# Altium PCB control_board_v2.PcbDoc (part 1 of 2)
Units mil, origin at the board's own origin, x right, y up, seen from the top; angles counter-clockwise.
Board outline 4214.76 x 4940 mil, 2 copper layers (Top Layer, Bottom Layer); 54 components, 71 nets, 299 pads, 38 vias.
Unrouted connection lines stored in the file: 3.
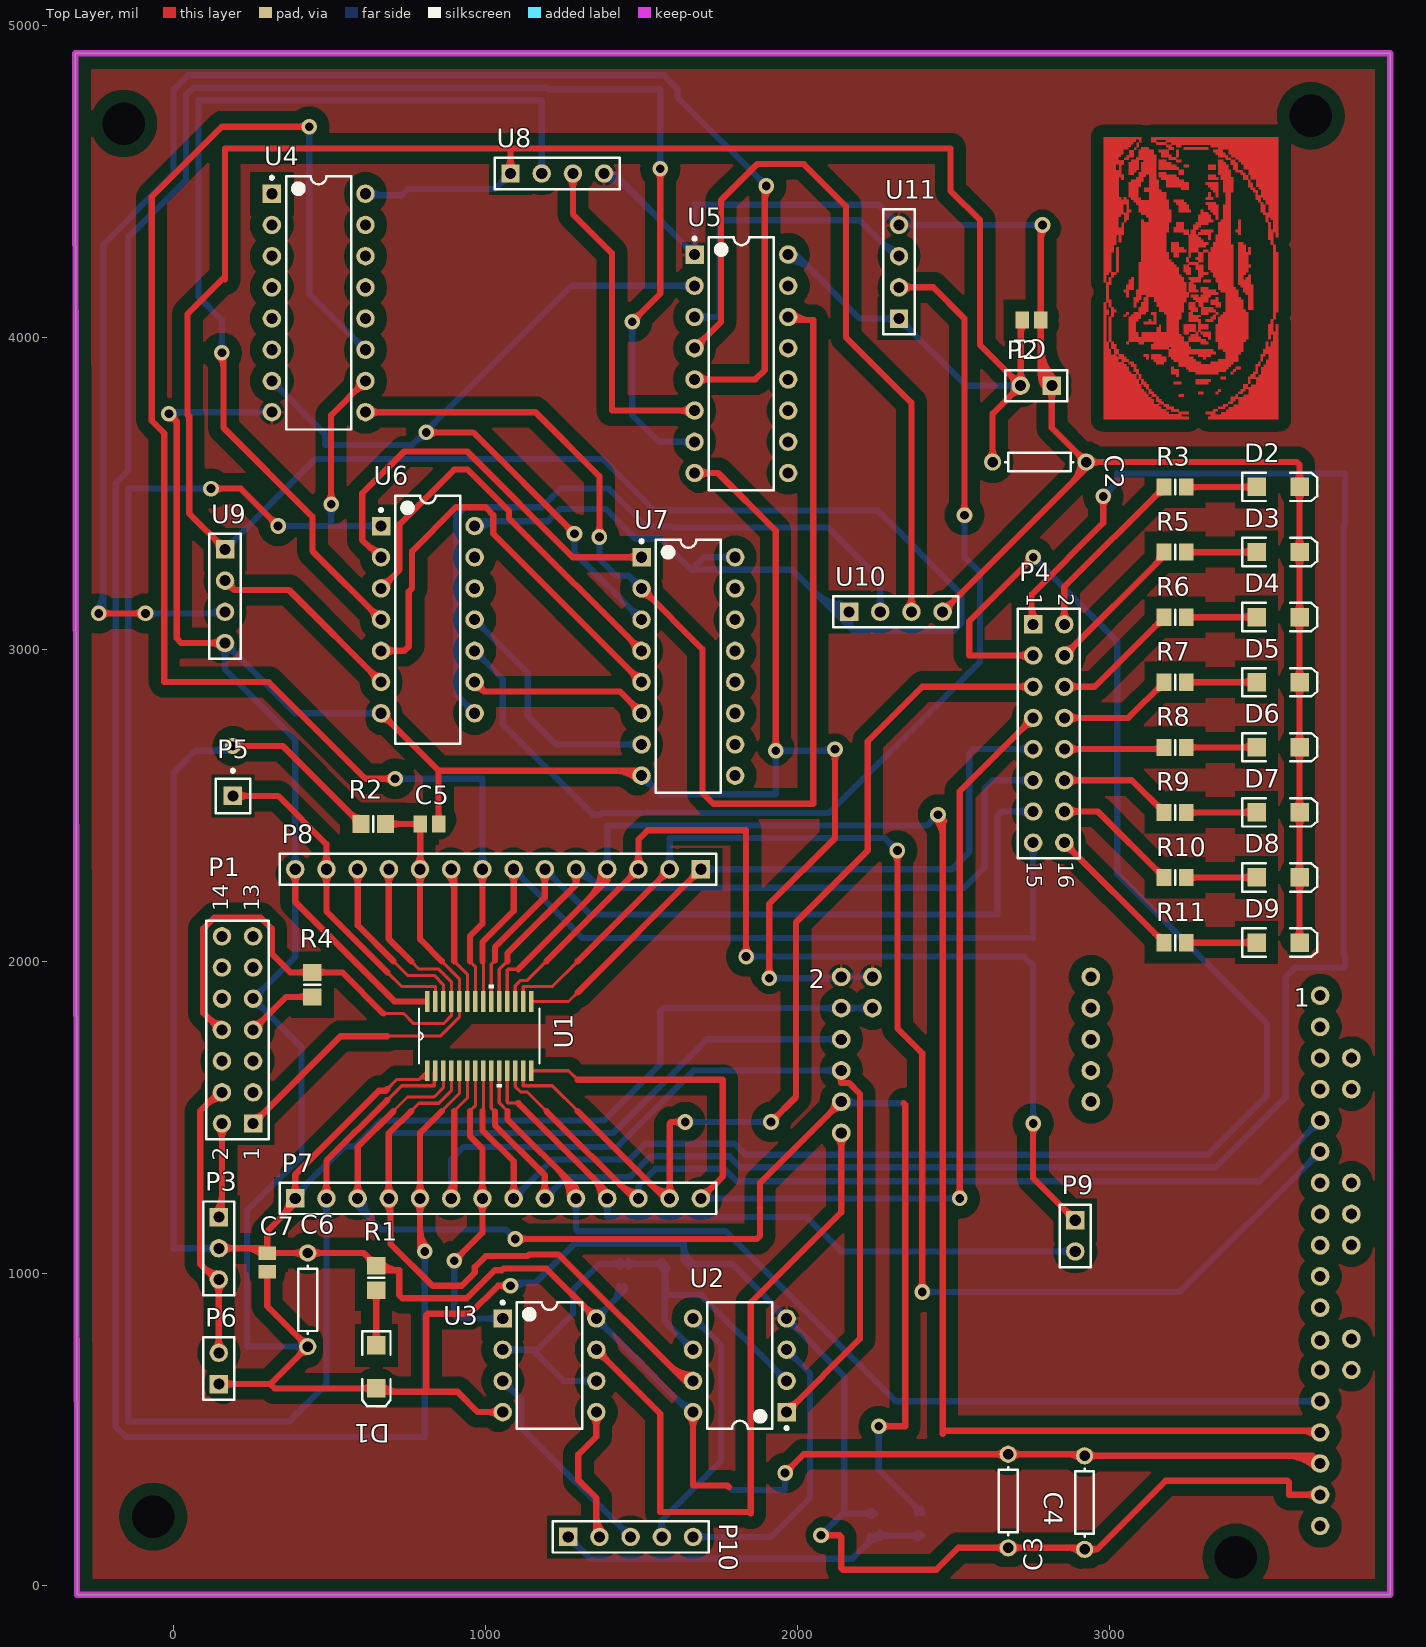
[diagram p0: Top Layer view]
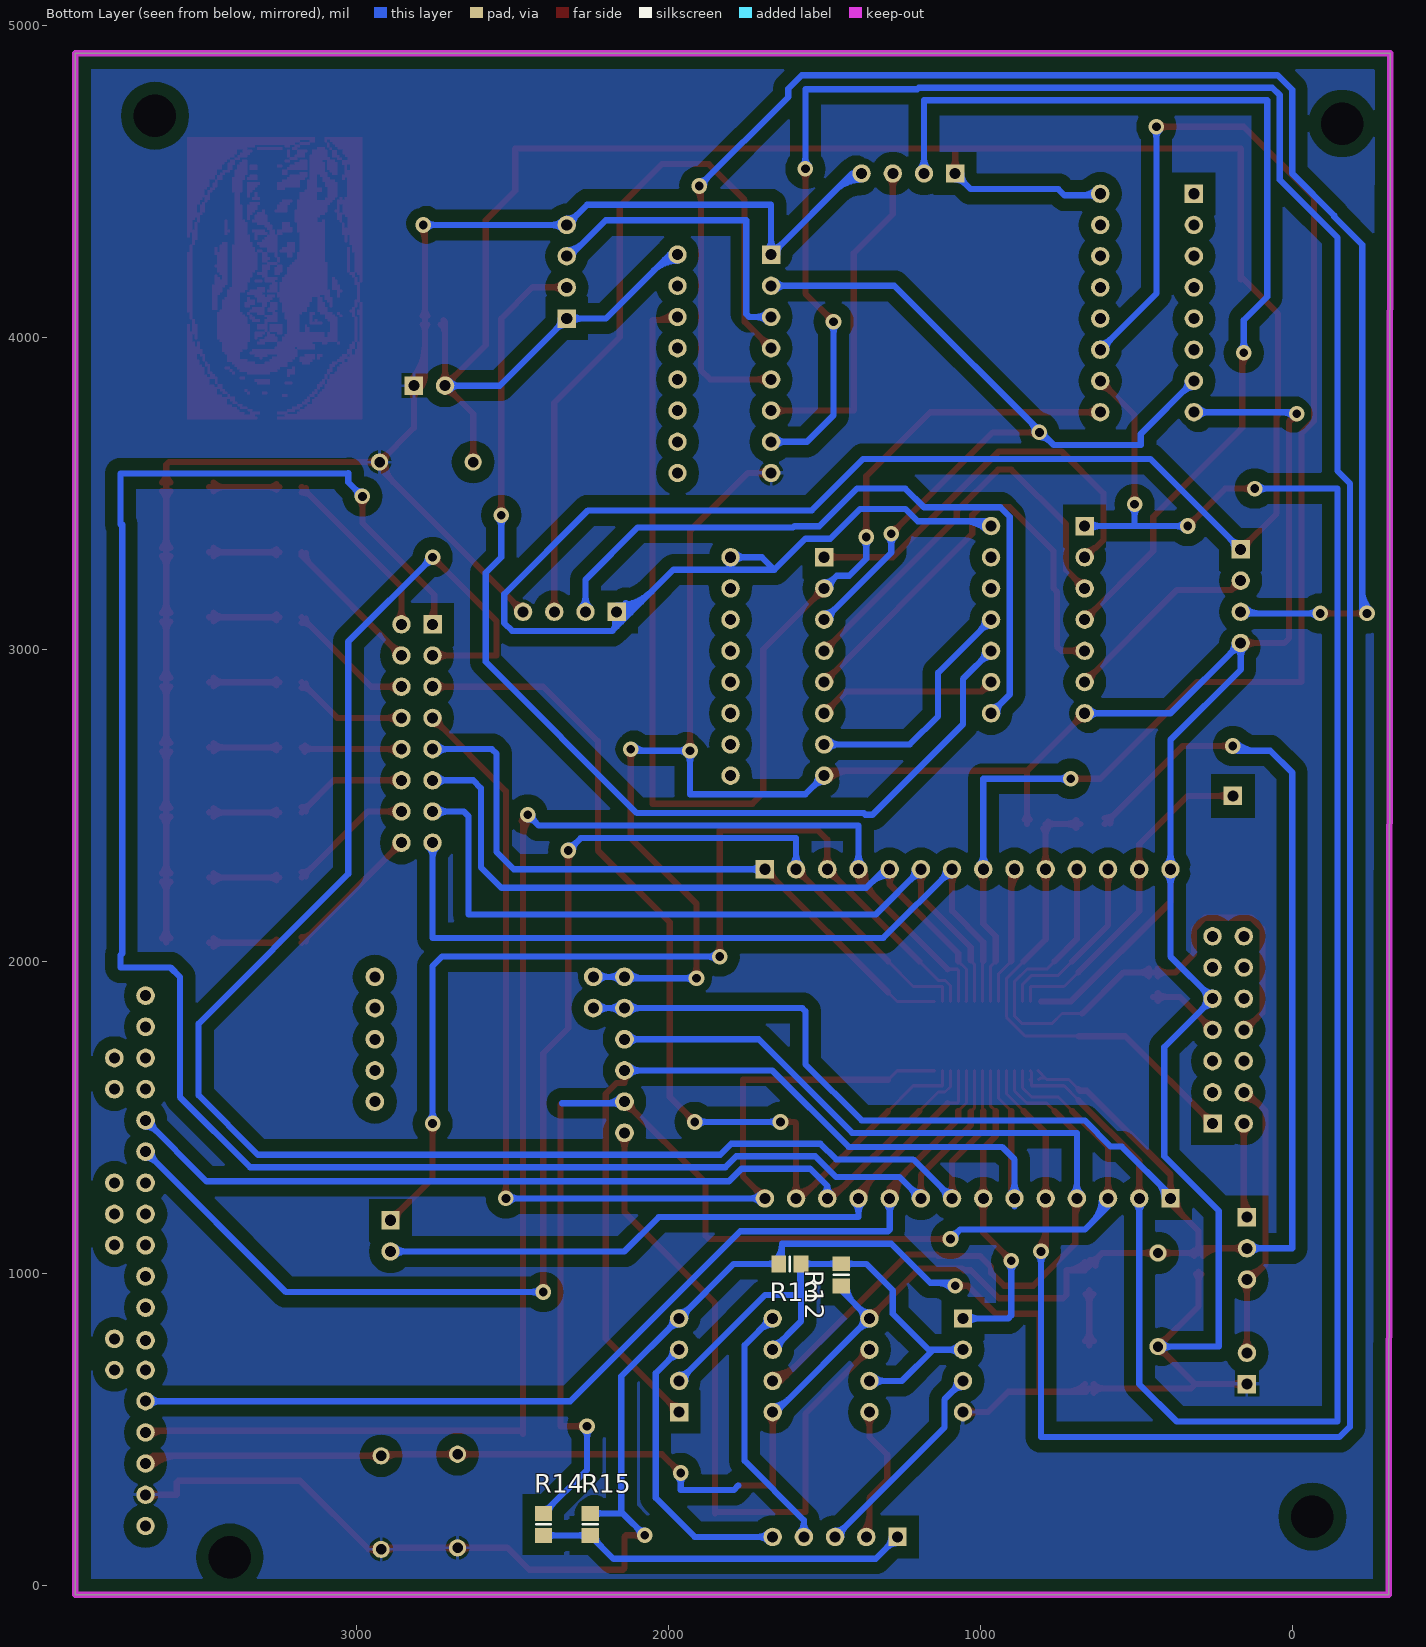
[diagram p1: Bottom Layer view, seen from below]

## Layer stack, top to bottom
Top Layer: signal copper 1.4
Dielectric: dielectric 12.6, FR-4, Dk 4.8
Bottom Layer: signal copper 1.4

## Board outline
-309.32,-30 -314.76,4910 3900,4910 3900,-30

## Design rules (kind name [scope] priority, off if disabled: settings)
Clearance poly_clearance [InPolyGon] p1: gap=40
Clearance MSP_CLEARANCE [TouchesRoom('MSP_ROOM') And OnLayer('Top Layer')] p2: gap=10
Clearance "Small stuff" [(HasFootprint('6-0805_M') OR HasFootprint('6-0805_N') OR HasFootprint('PW28') OR HasFootprint('C0805'))] p3: gap=10
Clearance Clearance_1 [All] p4: gap=20
PolygonConnect [All] p1: connectstyle=Relief reliefconductorwidth=10 reliefentries=4 polygonreliefangle="90 Angle" airgapwidth=10
RoomDefinition MSP_ROOM [InComponentClass('MSP_ROOM')] p1: confinementstyle=ConfineIn formatcopy=TRUE lockcomponents=FALSE outline 685,1525 685,2000 1295,2000 1295,1525
RoutingVias [All] p1: holewidth=28 width=50 viastyle="Through Hole" minholewidth=28 minwidth=50 maxholewidth=28 maxwidth=50
SMDNeckDown [HasFootprint('PW28')] p1: percent=75.000
SolderMaskExpansion [All] p1: expansion=4
Width MSP_WIDTH [TouchesRoom('MSP_ROOM')] p1: maxlimit=20 minlimit=7 preferedwidth=20 toplayer_prefwidth=10 bottomlayer_minwidth=20 minimp=50.000000 maximp=50.000000 favimp=50.000000
Width [All] p2: maxlimit=20 minlimit=20 preferedwidth=20 minimp=50.000000 maximp=50.000000 favimp=50.000000
28 further rules are at their usual default settings.

## Classes and differential pairs
component class investigator_control_board: 1 2 C6

## Components (designator, comment, footprint, x,y, rotation, side; value= is the part's Value field where it differs from the comment)
1 "MotorDriver" MotorControlHeader 3675,190 r180 top
2 "IMU" IMU 2140,1950 r0 top
C1 "Cap" C0805 2750,4055 r180 top
C2 "Cap Pol3" AXIAL-0.3 2775,3600 r0 top
C3 "Cap Pol3" AXIAL-0.3 2675,270 r270 top
C4 "Cap Pol3" AXIAL-0.3 2920,265 r270 top
C5 "Cap" C0805 820,2440 r180 top
C6 "Cap Pol3" AXIAL-0.3 430,915 r270 top
C7 "Cap" C0805 300,1035 r90 top
D1 "LED2" 3.2X1.6X1.1 650,700 r270 top
D2 "LED2" 3.2X1.6X1.1 3540,3520.52 r0 top
D3 "LED2" 3.2X1.6X1.1 3540,3311.87 r0 top
D4 "LED2" 3.2X1.6X1.1 3540,3103.23 r0 top
D5 "LED2" 3.2X1.6X1.1 3540,2894.58 r0 top
D6 "LED2" 3.2X1.6X1.1 3540,2685.94 r0 top
D7 "LED2" 3.2X1.6X1.1 3540,2477.29 r0 top
D8 "LED2" 3.2X1.6X1.1 3540,2268.65 r0 top
D9 "LED2" 3.2X1.6X1.1 3540,2060 r0 top
P1 "Header 7X2" HDR2X7 255,1480 r90 top
P2 "Header 2" HDR1X2 2815,3845 r180 top
P3 "Power Select" HDR1X3 145,1180 r270 top
P4 "Header 8X2" HDR2X8 2755,3080 r270 top
P5 "Plug" PIN1 190,2530 r0 top
P6 "Header 2" HDR1X2 145,645 r90 top
P7 "Header 14" HDR1X14 390,1240 r0 top
P8 "Header 14" HDR1X14 1690,2295 r180 top
P9 "Header 2" HDR1X2 2890,1170 r270 top
P10 "Header 5" HDR1X5 1265,155 r0 top
R1 "Res3" 6-0805_M 650,985 r90 top
R2 "Res3" 6-0805_M 640,2440 r180 top
R3 "Res3" 6-0805_N 3210,3520 r0 top
R4 "Res3" 6-0805_M 445,1925 r90 top
R5 "Res3" 6-0805_N 3210,3311.35 r0 top
R6 "Res3" 6-0805_N 3210,3102.71 r0 top
R7 "Res3" 6-0805_N 3210,2894.06 r0 top
R8 "Res3" 6-0805_N 3210,2685.42 r0 top
R9 "Res3" 6-0805_N 3210,2476.77 r0 top
R10 "Res3" 6-0805_N 3210,2268.13 r0 top
R11 "Res3" 6-0805_N 3210,2059.48 r0 top
R12 "Res3" 6-0805_N 1445,995 r270 bottom
R13 "Res3" 6-0805_N 1610,1030 r180 bottom
R14 "Res3" 6-0805_N 2400,195 r90 bottom
R15 "Res3" 6-0805_N 2250,195 r270 bottom
U1 "MSP430G2553_PW_2" PW28 980,1760 r90 top
U2 "LT1632CN8" DIP-8 1815,705 r180 top
U3 "LT1632CN8" DIP-8 1205,705 r0 top
U4 "CD4040" DIP-16 465,4110 r0 top
U5 "74153 MUX" DIP-16 1820,3915 r0 top
U6 "7404_Inverter" DIP-14 815,3095 r0 top
U7 "74139Decoder" DIP-16 1650,2945 r0 top
U8 "UltrasonicSensor" HDR1X4 1080,4525 r0 top
U9 "UltrasonicSensor" HDR1X4 165,3320 r270 top
U10 "UltrasonicSensor" HDR1X4 2165,3120 r0 top
U11 "UltrasonicSensor" HDR1X4 2325,4060 r90 top

## Footprints (in the part's own frame and the unit in brackets; to place one, negate y for a bottom-side part, rotate by r counter-clockwise, add the part's x,y. Pads: shape width x height; smd on the part's side, far side on the other; paste and mask are expansions set on the pad)
3.2X1.6X1.1 [mm] "SMT LED; 2 Flat Leads"
  rect 1.5x1.5 smd: 1(-1.75,0) 2(1.75,0)
  silkscreen extent -2.9,-1.15 3.2,1.15
6-0805_M [mm] "Chip Resistor, Body 2.0x1.2mm, IPC Low Density"
  rect 1.4x1.5 smd: 1(-1,0) 2(1,0)
  silkscreen extent 0,-0.65 0,0.65, body extent -1.07,-0.7 1.07,0.7, height 0.7
6-0805_N [mm] "Chip Resistor, Body 2.0x1.2mm, IPC Medium Density"
  rect 1.2x1.4 smd: 1(-0.9,0) 2(0.9,0)
  silkscreen extent 0,-0.6 0,0.6, body extent -1.07,-0.7 1.07,0.7, height 0.7
AXIAL-0.3 [mm] "Axial Device, Thru-Hole; 2 Leads; 0.3 in Pin Spacing"
  round 1.4 hole 0.85: 1(-3.81,0) 2(3.81,0)
  silkscreen extent -2.77,-0.76 2.77,0.76
C0805 [mm] "Chip Capacitor, Body 2.0x1.3mm, IPC High Density"
  rect 1.1x1.4 smd: 1(-0.75,0) 2(0.75,0)
  body extent -1.1,-0.72 1.1,0.72, height 1.4
DIP-8 [mm] "DIP; 8 Leads; Row Spacing 7.62 mm; Pitch 2.54 mm"
  rect 1.5x1.5 hole 0.9: 1(-3.81,3.81)
  round 1.5 hole 0.9: 2(-3.81,1.27) 3(-3.81,-1.27) 4(-3.81,-3.81) 5(3.81,-3.81) 6(3.81,-1.27) 7(3.81,1.27) 8(3.81,3.81)
  silkscreen extent -3.94,-5.15 2.65,5.23, body extent -3.6,-5.15 3.6,5.15, height 5.08
DIP-14 [mm] "DIP; 14 Leads; Row Spacing 7.62 mm; Pitch 2.54 mm"
  rect 1.5x1.5 hole 0.9: 1(-3.81,7.62)
  round 1.5 hole 0.9: 2(-3.81,5.08) 3(-3.81,2.54) 4(-3.81,0) 5(-3.81,-2.54) 6(-3.81,-5.08) 7(-3.81,-7.62) 8(3.81,-7.62) 9(3.81,-5.08) 10(3.81,-2.54) 11(3.81,0) 12(3.81,2.54) 13(3.81,5.08) 14(3.81,7.62)
  silkscreen extent -3.93,-10.1 2.65,10.1, body extent -3.6,-10.1 3.6,10.1, height 5.08
DIP-16 [mm] "DIP; 16 Leads; Row Spacing 7.62 mm; Pitch 2.54 mm"
  rect 1.5x1.5 hole 0.9: 1(-3.81,8.89)
  round 1.5 hole 0.9: 2(-3.81,6.35) 3(-3.81,3.81) 4(-3.81,1.27) 5(-3.81,-1.27) 6(-3.81,-3.81) 7(-3.81,-6.35) 8(-3.81,-8.89) 9(3.81,-8.89) 10(3.81,-6.35) 11(3.81,-3.81) 12(3.81,-1.27) 13(3.81,1.27) 14(3.81,3.81) 15(3.81,6.35) 16(3.81,8.89)
  silkscreen extent -3.93,-10.3 2.65,10.31, body extent -3.6,-10.28 3.6,10.28, height 5.08
HDR1X2 [mm] "Connector; Header; 2 Position"
  rect 1.5x1.5 hole 0.9: 1(0,0)
  round 1.5 hole 0.9: 2(2.54,0)
  silkscreen extent -1.27,-1.27 3.81,1.27
HDR1X3 [mm] "Connector; Header; 3 Position"
  rect 1.5x1.5 hole 0.9: 1(0,0)
  round 1.5 hole 0.9: 2(2.54,0) 3(5.08,0)
  silkscreen extent -1.27,-1.27 6.35,1.27
HDR1X4 [mm] "Connector; Header; 4 Position"
  rect 1.5x1.5 hole 0.9: 1(0,0)
  round 1.5 hole 0.9: 2(2.54,0) 3(5.08,0) 4(7.62,0)
  silkscreen extent -1.27,-1.27 8.89,1.27
HDR1X5 [mm] "Connector; Header; 5 Position"
  rect 1.5x1.5 hole 0.9: 1(0,0)
  round 1.5 hole 0.9: 2(2.54,0) 3(5.08,0) 4(7.62,0) 5(10.16,0)
  silkscreen extent -1.27,-1.27 11.43,1.27
HDR1X14 [mm] "Connector; Header; 14 Position"
  rect 1.5x1.5 hole 0.9: 1(0,0)
  round 1.5 hole 0.9: 2(2.54,0) 3(5.08,0) 4(7.62,0) 5(10.16,0) 6(12.7,0) 7(15.24,0) 8(17.78,0) 9(20.32,0) 10(22.86,0) 11(25.4,0) 12(27.94,0) 13(30.48,0) 14(33.02,0)
  silkscreen extent -1.27,-1.27 34.29,1.27
HDR2X7 [mm] "Connector; Header; 7x2 Position"
  rect 1.5x1.5 hole 0.9: 1(0,0)
  round 1.5 hole 0.9: 2(0,2.54) 3(2.54,0) 4(2.54,2.54) 5(5.08,0) 6(5.08,2.54) 7(7.62,0) 8(7.62,2.54) 9(10.16,0) 10(10.16,2.54) 11(12.7,0) 12(12.7,2.54) 13(15.24,0) 14(15.24,2.54)
  silkscreen extent -1.27,-1.27 16.51,3.81
HDR2X8 [mm] "Connector; Header; 8x2 Position"
  rect 1.5x1.5 hole 0.9: 1(0,0)
  round 1.5 hole 0.9: 2(0,2.54) 3(2.54,0) 4(2.54,2.54) 5(5.08,0) 6(5.08,2.54) 7(7.62,0) 8(7.62,2.54) 9(10.16,0) 10(10.16,2.54) 11(12.7,0) 12(12.7,2.54) 13(15.24,0) 14(15.24,2.54) 15(17.78,0) 16(17.78,2.54)
  silkscreen extent -1.27,-1.27 19.05,3.81
IMU [mil]
  round 60 hole 35.4: 0(0,0) 1(0,-100) 2(0,-200) 3(0,-300) 4(0,-400) 5(0,-500) 6(100,0) 7(100,-100) 8(800,0) 9(800,-100) 10(800,-200) 11(800,-300) 12(800,-400)
MotorControlHeader [mil]
  round 59.05 hole 35.43: 0(0,0) 1(0,-100) 2(0,-200)
  round 59 hole 35.43: 3(0,-300)
  round 59 hole 35.4: 4(0,-400) 18(-100,-500)
  round 60 hole 35.4: 5(0,-500) 6(0,-595) 7(0,-700) 8(0,-800) 9(0,-900) 10(0,-1000) 11(0,-1100) 12(0,-1200) 13(0,-1300) 14(0,-1400) 15(0,-1500) 16(0,-1600) 17(0,-1700) 19(-100,-600) 20(-100,-900) 21(-100,-1000) 22(-100,-1100) 23(-100,-1400) 24(-100,-1500)
PIN1 [mm] "Connector; Plug"
  rect 1.5x1.5 hole 0.9: 1(0,0)
  silkscreen extent -1.4,-1.4 1.4,2.17
PW28 [mil]
  rect 66x14 smd: 1(-111,166.34) 2(-111,140.75) 3(-111,115.16) 4(-111,89.57) 5(-111,63.98) 6(-111,38.39) 7(-111,12.8) 8(-111,-12.8) 9(-111,-38.39) 10(-111,-63.98) 11(-111,-89.57) 12(-111,-115.16) 13(-111,-140.75) 14(-111,-166.34) 15(111,-166.34) 16(111,-140.75) 17(111,-115.16) 18(111,-89.57) 19(111,-63.98) 20(111,-38.39) 21(111,-12.8) 22(111,12.8) 23(111,38.39) 24(111,63.98) 25(111,89.57) 26(111,115.16) 27(111,140.75) 28(111,166.34)
  silkscreen extent -164,-193 164,193

## Part data
C1 C5 C7: "Capacitor"
C2 C3 C4 C6: "Polarized Capacitor (Surface Mount)"
D1 D2 D3 D4 D5 D6 D7 D8 D9: "Typical RED, GREEN, YELLOW, AMBER GaAs LED"
P1: "Header, 7-Pin, Dual row"
P2 P6 P9: "Header, 2-Pin"
P3: library part "Header 3", "Header, 3-Pin"
P4: "Header, 8-Pin, Dual row"
P7 P8: "Header, 14-Pin"
P10: "Header, 5-Pin"
R1 R2 R3 R4 R5 R6 R7 R8 R9 R10 R11 R12 R13 R14 R15: "Resistor"
U1: "Imported"
U2 U3: "45MHz, 45V/µs, Dual Rail-to-Rail Input and Output Precision Operational Amplifier"

## Free pads (board coordinates)
  round 0 hole 136: 0(-160,4685) 0(-65,220) 0(3405,90) 0(3645,4710)

## Via types
v1: diameter 50, hole 28, Top Layer to Bottom Layer, 38 vias

## Nets (pads, with @x,y where several pads share a name; then routed paths per layer and width w, separated by ;. In a path a pad name is that pad's centre, name@x,y a point inside that pad or via, vN(x,y) a via of type N, cw(c..) or ccw(c..) an arc to the next point about the centre after c; other vN are vias at no path point)
1.8BIAS: R12.1 R13.2 U2.2 U2.6 U3.2 U3.6 | length 2389.8
  Bottom Layer w20: U3.2@1055,755 1150.43,755 ; U3.2@1068.81,741.19 cw(c1102.14,707.86) 1102.14,755 cw(c1102.14,802.14) U3.2@1068.81,768.81 ; U3.6@1341.19,641.19 ccw(c1307.86,607.86) 1307.86,655 ccw(c1307.86,702.14) U3.6@1341.19,668.81 ; U3.6@1355,655 1250.43,655 1150.43,755 ; 1407.13,1030 ccw(c1407.13,1064.36) R12.1@1431.43,1040.06 ; 1409.22,1030 cw(c1409.22,998.59) R12.1@1431.43,1020.8 ; R12.1@1458.57,1020.8 cw(c1480.78,998.59) 1480.78,1030 ; R12.1@1458.57,1040.06 ccw(c1482.87,1064.36) 1482.87,1030 ; R13.2@1564.93,1016.43 cw(c1541.68,993.18) 1574.57,993.18 cw(c1607.45,993.18) R13.2@1584.2,1016.43 ; R13.2@1564.93,1020.37 ccw(c1541.68,997.11) 1541.68,1030 ccw(c1541.68,1062.89) R13.2@1564.93,1039.63 ; R13.2@1565.43,1015.96 cw(c1542.91,991.08) 1576.43,992.75 ; 1576.38,993.7 cw(c1608.56,995.31) R13.2@1584.67,1016.92 ; U2.6@1645.47,755 ccw(c1598.33,755) 1631.66,788.34 ccw(c1665,821.67) U2.6@1665,774.53 ; U2.6@1665,755 1574.57,845.43 R13.2@1574.57,1030 ; U2.2@1945.47,655 ccw(c1898.33,655) 1931.66,688.34 ccw(c1965,721.67) U2.2@1965,674.53 ; U2.2@1965,655 1690,930 1579.57,930 R13.2@1574.57,1030 ; 1150.43,755 1165,755 1280,870 1280,945 1365,1030 1445,1030 R13.2@1574.57,1030
1.8IMU_CS: P10.2 U3.5 | length 589.7
  Top Layer w20: U3.5@1341.19,541.19 cw(c1307.86,507.86) 1355,507.86 cw(c1402.14,507.86) U3.5@1368.81,541.19 ; 1355,226.29 ccw(c1436.29,226.29) P10.2@1378.81,168.81 ; U3.5@1355,555 1355,476.4 1297.44,418.84 1297.44,337.44 1355,279.88 1355,165 P10.2@1365,155
1.8MISO: P10.1 R14.1 R15.2 | length 1423.9
  Bottom Layer w20: P10.1@1265,135.47 cw(c1265,88.33) 1298.34,121.66 cw(c1331.67,155) P10.1@1284.53,155 ; P10.1@1265,155 1335,85 2175.43,85 R15.2@2250,159.57 R14.1@2400,159.57 ; 2220.02,129.59 ccw(c2190.05,159.57) R15.2@2232.44,159.57 ; R15.2@2229.53,139.1 cw(c2246.06,122.56) R15.2@2246.06,145.94 ; R15.2@2263.57,149.93 cw(c2286.82,126.68) 2286.82,159.57 cw(c2286.82,192.45) R15.2@2263.57,169.2 ; R14.1@2386.43,149.94 ccw(c2363.18,126.68) 2363.18,159.57 ccw(c2363.18,192.45) R14.1@2386.43,169.2
1.8MOSI: P10.4 U2.5 | length 966.5
  Bottom Layer w20: P10.4@1551.19,168.81 ccw(c1517.86,202.14) 1565,202.14 ccw(c1612.14,202.14) P10.4@1578.81,168.81 ; P10.4@1565,155 1565,208.6 1755,398.6 1755,769.12 1669.12,855 U2.5@1665,855 ; U2.5@1665,835.47 cw(c1665,778.38) 1705.37,818.75 ; U2.5@1684.53,855 ccw(c1721.72,855) 1695.42,828.7
1.8MSP_CS: P10.3 U3.3 | length 817.9
  Bottom Layer w20: U3.3@1055,635.47 cw(c1055,588.33) 1088.34,621.66 cw(c1121.67,655) U3.3@1074.53,655 ; U3.3@1055,655 1114.53,595.47 1114.53,505.47 P10.3@1465,155 ; P10.3@1445.47,155 ccw(c1398.33,155) 1431.66,188.34 ccw(c1465,221.67) P10.3@1465,174.53
1.8SCK: P10.5 U2.3 | length 1080.9
  Bottom Layer w20: P10.5@1665,155 1915,155 2040,280 2040,680 U2.3@1965,755 ; P10.5@1678.81,141.19 cw(c1712.14,107.86) 1712.14,155 cw(c1712.14,202.14) P10.5@1678.81,168.81 ; U2.3@1965,735.47 cw(c1965,688.33) 1998.34,721.66 cw(c2031.67,755) U2.3@1984.53,755
3.3IMU_CS: 2.5 U3.7 | length 2387
  Top Layer w20: U3.7@1355,735.47 cw(c1355,688.33) 1388.34,721.66 cw(c1421.67,755) U3.7@1374.53,755 ; U3.7@1355,755 1560,550 1560,235 1845,235 1850,230 1850,905 2140,1195 2.5@2140,1450 ; 2.5@2125.86,1435.86 cw(c2091.72,1401.72) 2140,1401.72 cw(c2188.28,1401.72) 2.5@2154.14,1435.86
3.3MISO: 2.4 P7.3 R14.2 U1.3 | length 4760.6
  Top Layer w10: 704.87,1520 749.87,1565 835,1565 864.84,1594.84 U1.3@864.84,1649
  Top Layer w20: P7.3@576.19,1253.81 ccw(c542.86,1287.14) 590,1287.14 ccw(c637.14,1287.14) P7.3@603.81,1253.81 ; P7.3@590,1225 P7.3@590,1240 590,1405.13 704.87,1520 ; v1(1095,1110) 1870,1110 1880,1120 1880,1290 2.4@2140,1550 ; v1@1105.61,1099.39 cw(c1131.21,1073.79) 1131.21,1110 cw(c1131.21,1146.21) v1@1105.61,1120.61 ; 2.4@2120,1550 cw(c2071.72,1550) 2105.86,1515.86 cw(c2140,1481.72) 2.4@2140,1530 ; v1(2260,510) 2345,510 2345,1540 2340,1545 ; v1@2270.61,499.39 cw(c2296.21,473.79) 2296.21,510 cw(c2296.21,546.21) v1@2270.61,520.61
  Bottom Layer w20: P7.3@589.53,1240 ccw(c648.74,1240) 606.87,1198.13 ; P7.3@590,1215 665,1140 1065,1140 v1(1095,1110) ; P7.3@609.53,1240 ccw(c717.03,1240) 641.01,1163.99 ; v1@1080,1110 ccw(c1043.79,1110) 1069.39,1135.61 ccw(c1095,1161.21) v1@1095,1125 ; 2.4@2140,1550 2145,1545 2340,1545 ; 2.4@2154.14,1535.86 cw(c2176.21,1513.79) 2176.21,1545 ; 2.4@2154.14,1564.14 ccw(c2200.36,1610.36) 2200.36,1545 ; v1@2249.39,499.39 cw(c2223.79,473.79) 2260,473.79 cw(c2296.21,473.79) v1@2270.61,499.39 ; v1(2260,510) 2260,370.43 R14.2@2400,230.43 ; 2370.02,260.41 cw(c2340.05,230.43) R14.2@2382.44,230.43 ; R14.2@2379.53,250.9 ccw(c2396.06,267.44) R14.2@2396.06,244.06
3.3MOSI: 2.2 P7.4 U1.4 U2.7 | length 4138.5
  Top Layer w10: 761.43,1520 786.43,1545 850,1545 890.43,1585.43 U1.4@890.43,1649
  Top Layer w20: P7.4@676.19,1226.19 cw(c630.79,1180.79) 695,1180.79 ; P7.4@676.19,1253.81 ccw(c642.86,1287.14) 690,1287.14 ccw(c737.14,1287.14) P7.4@703.81,1253.81 ; 695,1204.93 cw(c725.07,1204.93) P7.4@703.81,1226.19 ; 761.43,1520 690,1448.57 P7.4@690,1240 690,1225 695,1220 695,1095 830,960 923.43,960 965,1001.57 965,1020 1000,1055 1134.39,1055 1139.39,1060 1234.18,1060 1639.18,655 U2.7@1665,655 ; 1587.59,706.59 ccw(c1665,784) U2.7@1665,674.53 ; 1621.74,672.45 ccw(c1665,715.71) U2.7@1665,654.53
  Bottom Layer w20: P7.4@676.19,1253.81 ccw(c642.86,1287.14) 690,1287.14 ccw(c737.14,1287.14) P7.4@703.81,1253.81 ; P7.4@690,1240 690,1450 1410,1450 1710,1750 2.2@2140,1750 ; 2.2@2125.86,1735.86 ccw(c2091.72,1701.72) 2091.72,1750 ccw(c2091.72,1798.28) 2.2@2125.86,1764.14
3.3MSP_CS: P7.7 U1.7 U3.1 | length 1499.1
  Top Layer w10: 950,1520 967.2,1537.2 U1.7@967.2,1649
  Top Layer w20: v1(900,1040) 990,1130 ; v1@900,1055 ccw(c900,1091.21) 925.61,1065.61 ccw(c951.21,1040) v1@915,1040 ; 950,1520 950,1440 990,1400 P7.7@990,1240 990,1225 990,1130 ; P7.7@976.19,1253.81 ccw(c942.86,1287.14) 990,1287.14 ccw(c1037.14,1287.14) P7.7@1003.81,1253.81 ; P7.7@990,1215 990,1130 ; 990,1192.86 ccw(c942.86,1192.86) 976.19,1226.19 cw(c942.86,1192.86) 990,1192.86 ; 990,1192.86 cw(c1037.14,1192.86) 1003.81,1226.19 ccw(c1037.14,1192.86) 990,1192.86
  Bottom Layer w20: v1@889.39,1029.39 cw(c863.79,1003.79) 900,1003.79 cw(c936.21,1003.79) v1@910.61,1029.39 ; v1(900,1040) 900,865 910,855 U3.1@1055,855 ; U3.1@1041.19,841.19 ccw(c1007.86,807.86) 1007.86,855 ccw(c1007.86,902.14) U3.1@1041.19,868.81
3.3SCK: 2.3 P7.6 U1.6 U2.1 | length 3594.2
  Top Layer w10: 900,1520 941.61,1561.61 U1.6@941.61,1649
  Top Layer w20: P7.6@876.19,1253.81 ccw(c818.71,1311.29) 900,1311.29 ; P7.6@890,1225 900,1235 900,1520 ; U2.1@1965,555 2200,790 2200,1574.85 2164.85,1610 2140,1610 ; U2.1@1965,574.53 ccw(c1965,621.67) 1998.34,588.34 ccw(c2031.67,555) U2.1@1984.53,555 ; 2.3@2140,1650 2140,1610 ; 2140,1610 ccw(c2110,1610) 2128,1634 cw(c2110,1610) 2140,1610 ; 2140,1610 cw(c2170,1610) 2152,1634 ccw(c2170,1610) 2140,1610
  Bottom Layer w20: P7.6@876.19,1253.81 ccw(c842.86,1287.14) 890,1287.14 ccw(c937.14,1287.14) P7.6@903.81,1253.81 ; P7.6@890,1215 P7.6@890,1240 890,1365 930,1405 1421.57,1405 1666.57,1650 2.3@2140,1650 ; 2.3@2125.86,1635.86 ccw(c2091.72,1601.72) 2091.72,1650 ccw(c2091.72,1698.28) 2.3@2125.86,1664.14
+5V: C1.2 C2.1 P2.2 U4.16 U5.16 U6.14 U7.16 U8.1 U9.1 U10.1 U11.1 | length 13024.4
  Top Layer w20: U9.1@145.47,3320 ccw(c98.33,3320) 131.66,3353.34 ccw(c165,3386.67) U9.1@165,3339.53 ; U9.1@165,3320 50,3435 50,3746.57 45,3751.57 45,4075 165,4195 ; 165,4185 165,4195 ; U8.1@1066.19,4538.81 ccw(c1032.86,4572.14) 1080,4572.14 ccw(c1127.14,4572.14) U8.1@1093.81,4538.81 ; U8.1@1080,4525 1080,4600 ; C2.1@2612.58,3612.42 ccw(c2582.61,3642.39) 2625,3642.39 ccw(c2667.39,3642.39) C2.1@2637.42,3612.42 ; C2.1@2625,3600 2625,3755 P2.2@2715,3845 ; P2.2@2701.19,3858.81 ccw(c2667.86,3892.14) 2715,3892.14 ccw(c2762.14,3892.14) P2.2@2728.81,3858.81 ; P2.2@2715,3825.47 ccw(c2715,3778.33) 2681.66,3811.66 ccw(c2648.33,3845) 2695.47,3845 ccw(c2648.33,3845) 2681.66,3878.34 ccw(c2715,3911.67) P2.2@2715,3864.53 ; 2715,4007.75 cw(c2761.82,4007.75) C1.2@2728.71,4040.85 ; C1.2@2720.47,4055 2715,4049.53 P2.2@2715,3845 ; 165,4195 165,4605 2490,4605 2490,4470 2585,4375 2585,3975 P2.2@2715,3845
  Bottom Layer w20: U9.1@165,3320 455,3610 1375,3610 1540,3445 2257,3445 2525,3177 2525,3084 2500,3059 2179,3059 ; U9.1@165,3339.53 ccw(c165,3386.67) 198.34,3353.34 ccw(c231.67,3320) U9.1@184.53,3320 ; U4.16@615,4455 730,4455 750,4475 1030,4475 U8.1@1080,4525 ; U4.16@628.81,4446.19 cw(c650.07,4424.93) 650.07,4455 ; U4.16@628.81,4473.81 ccw(c674.21,4519.21) 674.21,4455 ; U6.14@964.67,3395.33 cw(c1000.07,3359.93) 1000.07,3410 ; U6.14@965,3395 980,3410 1199.79,3410 ; U6.14@978.81,3381.19 cw(c1048.36,3311.64) 1048.36,3410 ; U8.1@1060.47,4525 cw(c1013.33,4525) 1046.66,4491.66 cw(c1080,4458.33) U8.1@1080,4505.47 ; 1199.79,3410.21 1239.58,3450 1385,3450 1480.47,3354.53 1560,3354.53 1659.53,3255 ; U7.16@1786.19,3281.19 ccw(c1752.86,3247.86) 1752.86,3295 ccw(c1752.86,3342.14) U7.16@1786.19,3308.81 ; U7.16@1787.99,3279.6 cw(c1768.8,3255) 1800,3255 ; U7.16@1795,3295 1699.53,3295 1659.53,3255 ; U7.16@1800,3295 1800,3255 ; U7.16@1812.01,3279.6 ccw(c1831.2,3255) 1800,3255 ; U5.16@1970,4245.47 cw(c1970,4137.97) 2046.01,4213.99 ; U5.16@1970,4265 1995,4265 2200,4060 U11.1@2325,4060 2540,3845 P2.2@2715,3845 ; U5.16@1970,4265.47 cw(c1970,4206.26) 2011.87,4248.13 ; 2051.43,3186.57 ccw(c2165,3300.14) U10.1@2165,3139.53 ; 2085.57,3152.43 ccw(c2165,3231.85) U10.1@2165,3119.53 ; 2119.71,3118.29 ccw(c2165,3163.57) U10.1@2165,3099.53 ; U10.1@2136.24,3148.47 ccw(c2159.83,3125.12) U10.1@2136.36,3101.64 ; U10.1@2150.45,3134.4 ccw(c2174.12,3110.98) 2150.57,3087.43 ; U10.1@2164.66,3120.33 ccw(c2188.4,3096.83) 2164.78,3073.22 ; U10.1@2178.88,3106.26 ccw(c2202.69,3082.69) 2179,3059 ; U11.1@2311.19,4046.19 ccw(c2277.86,4012.86) 2277.86,4060 ccw(c2277.86,4107.14) U11.1@2311.19,4073.81 ; U11.1@2325,4040.47 cw(c2325,3993.33) 2358.34,4026.66 cw(c2391.67,4060) U11.1@2344.53,4060 ; P2.2@2701.19,3831.19 ccw(c2667.86,3797.86) 2667.86,3845 ccw(c2667.86,3892.14) P2.2@2701.19,3858.81 ; 1659.53,3255 1800,3255 ; 1800,3255 1983,3255 2179,3059
E0: U5.6 U8.3 | length 1224.9
  Top Layer w20: U8.3@1266.19,4511.19 cw(c1232.86,4477.86) 1280,4477.86 cw(c1327.14,4477.86) U8.3@1293.81,4511.19 ; U8.3@1280,4525 1280,4395 1405,4270 1405,3765 U5.6@1670,3765 ; U5.6@1656.19,3751.19 ccw(c1622.86,3717.86) 1622.86,3765 ccw(c1622.86,3812.14) U5.6@1656.19,3778.81
E1: U5.5 U9.3 | length 5571
  Top Layer w20: v1(-240,3115) v1@-110,3115 ; v1@-229.39,3104.39 cw(c-203.79,3078.79) -203.79,3115 cw(c-203.79,3151.21) v1@-229.39,3125.61 ; v1@-100.61,3104.39 ccw(c-126.21,3078.79) -126.21,3115 ccw(c-126.21,3151.21) v1@-100.61,3125.61 ; U5.5@1670,3865 1865,3865 1895,3895 v1@1895,4465 ; U5.5@1683.81,3851.19 cw(c1717.14,3817.86) 1717.14,3865 cw(c1717.14,3912.14) U5.5@1683.81,3878.81 ; 1895,4436.72 cw(c1948.28,4436.72) v1@1910.61,4474.39
  Bottom Layer w20: v1@-250.61,3125.61 ccw(c-312.43,3187.43) -225,3187.43 ; v1(-240,3115) -225,3130 -225,4296.57 -135,4386.57 -135,4390 0,4525 0,4793.14 46.86,4840 1571.57,4840 1615,4796.57 1615,4770 v1(1900,4485) ; v1@-236.46,3111.46 ccw(c-264.14,3139.14) -225,3139.14 ; v1(-90,3115) 160,3115 U9.3@165,3120 ; v1@-79.39,3104.39 cw(c-53.79,3078.79) -53.79,3115 cw(c-53.79,3151.21) v1@-79.39,3125.61 ; 105.79,3115 ccw(c105.79,3179.21) U9.3@151.19,3133.81 ; 129.93,3115 cw(c129.93,3084.93) U9.3@151.19,3106.19 ; v1@1885,4485 ccw(c1848.79,4485) 1874.39,4510.61 ccw(c1900,4536.21) v1@1900,4500
E2: U5.4 U10.3 | length 2548.9
  Top Layer w20: U5.4@1670,3965 1755,4050 1755,4440 1870,4555 2020,4555 2155,4420 2155,4000 2365,3790 U10.3@2365,3120 ; U5.4@1670,3984.53 ccw(c1670,4031.67) 1703.34,3998.34 ccw(c1736.67,3965) U5.4@1689.53,3965 ; U10.3@2351.19,3133.81 ccw(c2317.86,3167.14) 2365,3167.14 ccw(c2412.14,3167.14) U10.3@2378.81,3133.81
E3: U5.3 U11.3 | length 1154.9
  Bottom Layer w20: U5.3@1670,4065 1740,4065 1750,4075 1750,4375 2200,4375 2315,4260 U11.3@2325,4260 ; U5.3@1683.81,4051.19 cw(c1717.14,4017.86) 1717.14,4065 cw(c1717.14,4112.14) U5.3@1683.81,4078.81 ; 2274.59,4300.41 ccw(c2325,4350.81) U11.3@2325,4279.53 ; 2298.74,4276.26 cw(c2282.47,4260) U11.3@2305.47,4260
ECHO: P7.5 U1.5 U5.7 | length 10052.8
  Top Layer w10: 860,1520 916.02,1576.02 U1.5@916.02,1649
  Top Layer w20: P7.5@776.19,1226.19 cw(c742.86,1192.86) 790,1192.86 cw(c837.14,1192.86) P7.5@803.81,1226.19 ; P7.5@776.19,1253.81 ccw(c742.86,1287.14) 790,1287.14 ccw(c837.14,1287.14) P7.5@803.81,1253.81 ; 790,1094.14 ccw(c829.14,1094.14) v1@801.46,1066.46 ; 790,1142.43 ccw(c877.43,1142.43) v1@815.61,1080.61 ; v1(805,1070) 790,1085 P7.5@790,1240 790,1450 860,1520 ; v1(1470,4050) 1560,4140 v1(1560,4540) ; v1@1470,4065 ccw(c1470,4101.21) 1495.61,4075.61 ccw(c1521.21,4050) v1@1485,4050 ; v1@1549.39,4529.39 cw(c1523.79,4503.79) 1560,4503.79 cw(c1596.21,4503.79) v1@1570.61,4529.39
  Bottom Layer w20: v1@794.39,1059.39 cw(c768.79,1033.79) 805,1033.79 cw(c841.21,1033.79) v1@815.61,1059.39 ; v1(805,1070) 805,475 -151.57,475 -185,508.43 -185,3531.57 -145,3571.57 -145,4320 40,4505 40,4776.57 63.43,4800 1196.57,4800 1201.57,4795 1560,4795 v1(1560,4540) ; v1@1459.39,4039.39 cw(c1433.79,4013.79) 1470,4013.79 cw(c1506.21,4013.79) v1@1480.61,4039.39 ; v1(1470,4050) 1470,3750 1555,3665 U5.7@1670,3665 ; v1@1549.39,4550.61 ccw(c1523.79,4576.21) 1560,4576.21 ccw(c1596.21,4576.21) v1@1570.61,4550.61 ; U5.7@1656.19,3651.19 ccw(c1622.86,3617.86) 1622.86,3665 ccw(c1622.86,3712.14) U5.7@1656.19,3678.81
ENCODER_1: P7.11 P9.2 U1.11 | length 2426
  Top Layer w10: U1.11@1069.57,1649 1069.57,1548.72 1072.85,1545.43 1104.57,1545.43
  Top Layer w20: 1104.57,1545.43 1390,1260 P7.11@1390,1240 P7.11@1390,1225 ; 1342.52,1307.48 cw(c1275.04,1240) P7.11@1370.47,1240 ; 1376.66,1273.34 cw(c1343.33,1240) P7.11@1390.47,1240
  Bottom Layer w20: P7.11@1376.19,1226.19 cw(c1342.86,1192.86) 1390,1192.86 cw(c1437.14,1192.86) P7.11@1403.81,1226.19 ; P7.11@1390,1225 1390,1180 2030,1180 2140,1070 P9.2@2890,1070 ; P9.2@2876.19,1056.19 ccw(c2842.86,1022.86) 2842.86,1070 ccw(c2842.86,1117.14) P9.2@2876.19,1083.81
ENCODER_2: P8.3 P9.1 U1.17 | length 3700.6
  Top Layer w10: U1.17@1095.16,1871 1095.16,1921.69 1112.46,1939 1134,1939 1195,2000
  Top Layer w20: 1195,2000 P8.3@1490,2295 1490,2390 1520,2420 1835,2420 v1@1835,2025 ; P8.3@1470.47,2295 cw(c1423.33,2295) 1456.66,2261.66 cw(c1490,2228.33) P8.3@1490,2275.47 ; P8.3@1476.19,2308.81 ccw(c1442.86,2342.14) 1490,2342.14 ccw(c1537.14,2342.14) P8.3@1503.81,2308.81 ; v1@1824.39,2025.61 ccw(c1798.79,2051.21) 1835,2051.21 ccw(c1871.21,2051.21) v1@1845.61,2025.61 ; v1@2744.39,1469.39 cw(c2718.79,1443.79) 2755,1443.79 cw(c2791.21,1443.79) v1@2765.61,1469.39 ; v1(2755,1480) 2755,1305 P9.1@2890,1170 ; P9.1@2870.47,1170 ccw(c2823.33,1170) 2856.66,1203.34 ccw(c2890,1236.67) P9.1@2890,1189.53
  Bottom Layer w20: v1(1835,2015) 2725,2015 2755,1985 v1(2755,1480) ; v1@1845.61,2004.39 cw(c1871.21,1978.79) 1871.21,2015 cw(c1871.21,2051.21) v1@1845.61,2025.61 ; v1@2744.39,1490.61 ccw(c2718.79,1516.21) 2755,1516.21 ccw(c2791.21,1516.21) v1@2765.61,1490.61
GND: 1.1 2.0 2.6 C1.1 C2.2 C3.2 C4.2 C5.1 C6.2 C7.1 D1.2 D2.2 D3.2 D4.2 D5.2 D6.2 D7.2 D8.2 D9.2 P1.9 P2.1 P6.1 P8.14 R13.1 R15.1 U1.28 U2.4 U3.4 U4.8 U5.1 U5.8 U6.7 U7.8 U8.4 U9.4 U10.4 U11.4 | length 26257.9
  Top Layer w20: v1(-15,3755) 10,3730 ; v1@-14.74,3740 cw(c-14.16,3705.85) 10,3730 ; v1@0,3754.74 ccw(c34.15,3754.16) 10,3730 ; P6.1@145,645 310,645 ; U9.4@151.19,3006.19 ccw(c117.86,2972.86) 117.86,3020 ccw(c117.86,3067.14) U9.4@151.19,3033.81 ; P6.1@158.81,631.19 cw(c192.14,597.86) 192.14,645 cw(c192.14,692.14) P6.1@158.81,658.81 ; U9.4@165,3020 25,3020 10,3035 10,3730 ; C7.1@291.76,997.23 cw(c271.87,977.34) 300,977.34 cw(c328.13,977.34) C7.1@308.24,997.23 ; C7.1@300,1005.47 300,895 C6.2@430,765 310,645 ; P8.14@376.19,2281.19 cw(c342.86,2247.86) 390,2247.86 cw(c437.14,2247.86) P8.14@403.81,2281.19 ; P8.14@390,2295 390,2190 709,1871 805,1871 ; C6.2@430,747.44 ccw(c430,705.05) 400.02,735.02 ccw(c370.05,765) 412.44,765 ccw(c370.05,765) 400.02,794.98 ccw(c430,824.95) C6.2@430,782.56 ; D1.2@636.19,617.29 ccw(c602.86,583.96) 602.86,631.1 ccw(c602.86,678.25) D1.2@636.19,644.91 ; D1.2@663.81,644.91 ccw(c723.95,705.05) 723.95,620 ; U6.7@665,2775.47 cw(c665,2728.33) 698.34,2761.66 cw(c731.67,2795) U6.7@684.53,2795 ; U6.7@665,2795 849.53,2610.47 ; C5.1@841.29,2454.15 ccw(c821.39,2474.04) 849.53,2474.04 ccw(c877.66,2474.04) C5.1@857.77,2454.15 ; C5.1@849.53,2440 849.53,2610.47 ; U3.4@1041.19,541.19 ccw(c1007.86,507.86) 1007.86,555 ccw(c1007.86,602.14) U3.4@1041.19,568.81 ; U3.4@1055,555 975,555 910,620 810,620 ; v1@1069.39,949.39 ccw(c1043.79,923.79) 1043.79,960 ccw(c1043.79,996.21) v1@1069.39,970.61 ; v1(1080,960) 1040,960 950,870 815,870 810,865 810,620 ; 1415.5,2610.47 cw(c1415.5,2510.5) U7.8@1486.19,2581.19 ; 1463.79,2610.47 cw(c1463.79,2558.79) U7.8@1500.33,2595.33 ; U7.8@1500,2595 1484.53,2610.47 849.53,2610.47 ; U5.8@1670,3565 1745,3565 1930,3380 v1(1930,2675) ; U5.8@1683.81,3551.19 cw(c1717.14,3517.86) 1717.14,3565 cw(c1717.14,3612.14) U5.8@1683.81,3578.81 ; v1@1898.61,1956.39 ccw(c1873,1982) 1909.22,1982 ccw(c1945.43,1982) v1@1919.82,1956.39 ; v1@1910,1945 v1(1909.22,1945.78) 1909.22,2184.22 2120,2395 v1(2120,2680) ; v1@1919.39,2685.61 ccw(c1893.79,2711.21) 1930,2711.21 ccw(c1966.21,2711.21) v1@1940.61,2685.61 ; v1(2075,160) 2135,160 2140,155 2140,55 2145,50 2445,50 2515,120 C3.2@2675,120 2915,120 C4.2@2920,115 2960,115 ; v1@2085.61,149.39 cw(c2111.21,123.79) 2111.21,160 cw(c2111.21,196.21) v1@2085.61,170.61 ; v1@2109.39,2669.39 cw(c2083.79,2643.79) 2120,2643.79 cw(c2156.21,2643.79) v1@2130.61,2669.39 ; U10.4@2465,3120 2925,3580 C2.2@2925,3600 ; U10.4@2465,3139.53 ccw(c2465,3186.67) 2498.34,3153.34 ccw(c2531.67,3120) U10.4@2484.53,3120 ; C3.2@2662.58,107.58 ccw(c2632.61,77.61) 2632.61,120 ccw(c2632.61,162.39) C3.2@2662.58,132.42 ; C3.2@2687.42,107.58 cw(c2717.39,77.61) 2717.39,120 cw(c2717.39,162.39) C3.2@2687.42,132.42 ; C1.1@2771.29,4040.85 cw(c2751.39,4020.96) 2779.53,4020.96 cw(c2807.66,4020.96) C1.1@2787.77,4040.85 ; C1.1@2771.29,4069.15 ccw(c2751.39,4089.04) 2779.53,4089.04 ccw(c2807.66,4089.04) C1.1@2787.77,4069.15 ; 2779.53,3881.21 ccw(c2851.21,3881.21) P2.1@2800.52,3830.52 ; 2779.53,3929.5 ccw(c2899.5,3929.5) P2.1@2814.67,3844.67 ; 2779.53,3977.78 ccw(c2947.78,3977.78) P2.1@2828.81,3858.81 ; 2779.53,4310.58 cw(c2834.42,4310.58) v1@2795.61,4349.39 ; v1(2785,4360) 2779.53,4354.53 C1.1@2779.53,4055 2779.53,3880.47 P2.1@2815,3845 2815,3710 C2.2@2925,3600 ; P2.1@2795.47,3845 ccw(c2748.33,3845) 2781.66,3878.34 ccw(c2815,3911.67) P2.1@2815,3864.53 ; P2.1@2801.19,3831.19 cw(c2767.86,3797.86) 2815,3797.86 cw(c2862.14,3797.86) P2.1@2828.81,3831.19 ; 2865.54,120 cw(c2865.54,60.54) C4.2@2907.58,102.58 ; 2880.88,3535.88 ccw(c2816.77,3600) 2907.44,3600 ccw(c2865.05,3600) 2895.02,3629.98 ccw(c2925,3659.95) C2.2@2925,3617.56 ; 2889.68,120 ccw(c2889.68,145.32) C4.2@2907.58,127.42 ; 2915.02,3570.02 ccw(c2885.05,3600) C2.2@2927.44,3600 ; C4.2@2932.93,103.12 cw(c2960,78.22) 2960,115 ; C4.2@2932.93,126.88 ccw(c2960,151.78) 2960,115 ; C2.2@2937.42,3587.58 cw(c2967.39,3557.61) 2967.39,3600 cw(c2967.39,3642.39) C2.2@2937.42,3612.42 ; D9.2@3595.09,2073.81 ccw(c3561.75,2107.14) 3608.9,2107.14 ccw(c3656.04,2107.14) D9.2@3622.71,2073.81 ; D8.2@3595.09,2254.84 cw(c3561.75,2221.5) 3608.9,2221.5 cw(c3656.04,2221.5) D8.2@3622.71,2254.84 ; D8.2@3595.09,2282.45 ccw(c3561.75,2315.79) 3608.9,2315.79 ccw(c3656.04,2315.79) D8.2@3622.71,2282.45 ; D7.2@3595.09,2463.48 cw(c3561.75,2430.15) 3608.9,2430.15 cw(c3656.04,2430.15) D7.2@3622.71,2463.48 ; D7.2@3595.09,2491.1 ccw(c3561.75,2524.44) 3608.9,2524.44 ccw(c3656.04,2524.44) D7.2@3622.71,2491.1 ; D6.2@3595.09,2672.13 cw(c3561.75,2638.79) 3608.9,2638.79 cw(c3656.04,2638.79) D6.2@3622.71,2672.13 ; D6.2@3595.09,2699.74 ccw(c3561.75,2733.08) 3608.9,2733.08 ccw(c3656.04,2733.08) D6.2@3622.71,2699.74 ; D5.2@3595.09,2880.77 cw(c3561.75,2847.44) 3608.9,2847.44 cw(c3656.04,2847.44) D5.2@3622.71,2880.77 ; D5.2@3595.09,2908.39 ccw(c3561.75,2941.73) 3608.9,2941.73 ccw(c3656.04,2941.73) D5.2@3622.71,2908.39 ; D4.2@3595.09,3089.42 cw(c3561.75,3056.08) 3608.9,3056.08 cw(c3656.04,3056.08) D4.2@3622.71,3089.42 ; D4.2@3595.09,3117.04 ccw(c3561.75,3150.37) 3608.9,3150.37 ccw(c3656.04,3150.37) D4.2@3622.71,3117.04 ; D3.2@3595.09,3298.07 cw(c3561.75,3264.73) 3608.9,3264.73 cw(c3656.04,3264.73) D3.2@3622.71,3298.07 ; D3.2@3595.09,3325.68 ccw(c3561.75,3359.02) 3608.9,3359.02 ccw(c3656.04,3359.02) D3.2@3622.71,3325.68 ; D2.2@3595.09,3506.71 cw(c3561.75,3473.38) 3608.9,3473.38 cw(c3656.04,3473.38) D2.2@3622.71,3506.71 ; D2.2@3595.09,3534.33 ccw(c3561.75,3567.66) 3608.9,3567.66 ccw(c3656.04,3567.66) D2.2@3622.71,3534.33 ; D9.2@3608.9,2060 D8.2@3608.9,2268.65 D7.2@3608.9,2477.29 D6.2@3608.9,2685.94 D5.2@3608.9,2894.58 D4.2@3608.9,3103.23 D3.2@3608.9,3311.87 D2.2@3608.9,3520.52 3608.9,3591.1 3600,3600 C2.2@2925,3600 ; 1.1@3661.19,276.19 ccw(c3627.86,242.86) 3627.86,290 ccw(c3627.86,337.14) 1.1@3661.19,303.81 ; 1.1@3675,290 3575,290 3575,330 3570,335 3180,335 2960,115 ; 310,645 323.9,631.1 D1.2@650,631.1 661.1,620 810,620
  Bottom Layer w20: v1(-15,3755) -10,3760 U4.8@315,3760 ; v1@-4.39,3744.39 cw(c33.28,3706.72) 33.28,3760 ; U9.4@151.19,3006.19 cw(c117.86,2972.86) 165,2972.86 cw(c212.14,2972.86) U9.4@178.81,3006.19 ; U9.4@165,3000.47 cw(c165,2953.33) 198.34,2986.66 cw(c231.67,3020) U9.4@184.53,3020 ; P1.9@255,1860.47 cw(c255,1813.33) 288.34,1846.66 cw(c321.67,1880) 274.53,1880 cw(c321.67,1880) 288.34,1913.34 cw(c255,1946.67) P1.9@255,1899.53 ; U4.8@301.19,3746.19 ccw(c267.86,3712.86) 267.86,3760 ccw(c267.86,3807.14) U4.8@301.19,3773.81 ; P8.14@376.19,2281.19 cw(c342.86,2247.86) 390,2247.86 cw(c437.14,2247.86) P8.14@403.81,2281.19 ; P8.14@376.19,2308.81 ccw(c342.86,2342.14) 390,2342.14 ccw(c437.14,2342.14) P8.14@403.81,2308.81 ; C6.2@417.58,752.58 ccw(c387.61,722.61) 387.61,765 ccw(c387.61,807.39) C6.2@417.58,777.42 ; C6.2@430,765 235,765 235,1200 410,1375 410,1725 P1.9@255,1880 390,2015 P8.14@390,2295 390,2710 165,2935 U9.4@165,3020 390,2795 U6.7@665,2795 ; U6.7@651.19,2781.19 ccw(c617.86,2747.86) 617.86,2795 ccw(c617.86,2842.14) U6.7@651.19,2808.81 ; v1(1080,960) 1090,970 1160,970 1285,1095 1635,1095 1635,1040.43 R13.1@1645.43,1030 1790,1030 U2.4@1965,855 2150,670 2150,230 ; v1@1090.61,949.39 cw(c1140.36,899.64) 1140.36,970 ; U8.4@1380,4505.47 cw(c1380,4385.9) 1464.55,4470.45 ; U8.4@1380,4525 1410,4525 ; U8.4@1380,4525.47 cw(c1380,4454.19) 1430.41,4504.59 ; U8.4@1397.86,4517.1 cw(c1410,4511.72) 1410,4525 ; U8.4@1397.86,4532.9 ccw(c1410,4538.28) 1410,4525 ; U7.8@1500,2575.47 cw(c1500,2528.33) 1533.34,2561.66 cw(c1566.67,2595) U7.8@1519.53,2595 ; U7.8@1500,2595 1560,2535 1930,2535 v1(1930,2675) 2115,2675 v1(2120,2680) ; 1635,1092.01 ccw(c1703.51,1092.01) R13.1@1655.07,1043.57 ; U5.1@1650.47,4265 ccw(c1603.33,4265) 1636.66,4298.34 ccw(c1670,4331.67) U5.1@1670,4284.53 ; R13.1@1655.07,1020.37 cw(c1678.32,997.11) 1678.32,1030 cw(c1678.32,1062.89) R13.1@1655.07,1039.63 ; U5.1@1656.19,4278.81 ccw(c1622.86,4312.14) 1670,4312.14 ccw(c1717.14,4312.14) U5.1@1683.81,4278.81 ; v1(1909.22,1945.78) 2135.78,1945.78 2.0@2140,1950 2.6@2240,1950 ; v1@1919.39,2664.39 cw(c1893.79,2638.79) 1930,2638.79 cw(c1966.21,2638.79) 1940.61,2664.39 cw(c1966.21,2638.79) 1966.21,2675 cw(c1966.21,2711.21) v1@1940.61,2685.61 ; v1@1919.82,1935.18 cw(c1945.43,1909.57) 1945.43,1945.78 cw(c1945.43,1982) v1@1919.82,1956.39 ; U2.4@1945.47,855 ccw(c1898.33,855) 1931.66,888.34 ccw(c1965,921.67) U2.4@1965,874.53 ; U2.4@1965,835.47 cw(c1965,788.33) 1998.34,821.66 cw(c2031.67,855) U2.4@1984.53,855 ; 2071.72,2675 ccw(c2071.72,2728.28) v1@2109.39,2690.61 ; v1(2075,160) 2145,230 2150,230 ; v1@2075,175 ccw(c2075,211.21) 2100.61,185.61 ccw(c2126.21,160) v1@2090,160 ; 2081.54,1945.78 ccw(c2081.54,2008.46) 2.0@2125.86,1964.14 ; 2101.89,1945.78 cw(c2101.89,1911.89) 2.0@2125.86,1935.86 ; 2.0@2154.14,1935.86 cw(c2188.28,1901.72) 2188.28,1950 cw(c2188.28,1998.28) 2.0@2154.14,1964.14 ; 2.6@2225.86,1935.86 ccw(c2191.72,1901.72) 2191.72,1950 ccw(c2191.72,1998.28) 2.6@2225.86,1964.14 ; R15.1@2236.43,220.8 ccw(c2213.18,197.55) 2213.18,230.43 ccw(c2213.18,263.32) R15.1@2236.43,240.06 ; R15.1@2250,230.43 2150.43,230.43 2150,230 ; U11.4@2305.47,4360 ccw(c2258.33,4360) 2291.66,4393.34 ccw(c2325,4426.67) U11.4@2325,4379.53 ; U11.4@2338.81,4346.19 cw(c2372.14,4312.86) 2372.14,4360 cw(c2372.14,4407.14) U11.4@2338.81,4373.81 ; v1@2774.39,4349.39 ccw(c2748.79,4323.79) 2748.79,4360 ccw(c2748.79,4396.21) v1@2774.39,4370.61 ; v1@2790,4365 v1(2785,4360) U11.4@2325,4360 2260,4425 1670,4425 U5.1@1670,4265 1410,4525
LOW_PWR: P5.1 P8.13 U1.27 | length 1298.4
  Top Layer w10: 685,1965 731,1919 839.25,1919 U1.27@839.25,1871
  Top Layer w20: P5.1@190,2530 335,2530 490,2375 P8.13@490,2295 490,2160 685,1965 ; P5.1@203.81,2516.19 cw(c237.14,2482.86) 237.14,2530 cw(c237.14,2577.14) P5.1@203.81,2543.81 ; P8.13@476.19,2281.19 cw(c442.86,2247.86) 490,2247.86 cw(c537.14,2247.86) P8.13@503.81,2281.19 ; P8.13@476.19,2308.81 ccw(c442.86,2342.14) 490,2342.14 ccw(c537.14,2342.14) P8.13@503.81,2308.81
M1IN1: 1.4 P7.10 U1.10 | length 3569.4
  Top Layer w10: U1.10@1045,1647.98 U1.10@1043.98,1649 1043.98,1546.02 1070,1520
  Top Layer w20: 1070,1520 1070,1493.98 1290,1273.98 P7.10@1290,1240 P7.10@1290,1225 ; 1232.64,1331.34 cw(c1141.3,1240) P7.10@1270.47,1240 ; 1266.78,1297.19 cw(c1209.59,1240) P7.10@1290.47,1240 ; P7.10@1280.17,1256.87 ccw(c1270.21,1273.97) 1290,1273.97 ccw(c1309.79,1273.97) P7.10@1299.83,1256.87
  Bottom Layer w20: P7.10@1276.19,1226.19 cw(c1242.86,1192.86) 1290,1192.86 cw(c1337.14,1192.86) P7.10@1303.81,1226.19 ; P7.10@1290,1215 1290,1140 1295,1135 1769.18,1135 2314.18,590 1.4@3675,590 ; 1.4@3661.21,576.21 ccw(c3627.92,542.92) 3627.92,590 ccw(c3627.92,637.08) 1.4@3661.21,603.79
M1IN2: 1.3 P8.4 U1.18 | length 5562
  Top Layer w10: U1.18@1069.57,1871 1069.57,1971.28 1072.85,1974.57 1104.57,1974.57
  Top Layer w20: 1104.57,1974.57 1390,2260 ; 1331.92,2201.92 ccw(c1238.83,2295) P8.4@1370.47,2295 ; 1366.06,2236.06 ccw(c1307.12,2295) P8.4@1390.47,2295 ; P8.4@1379.74,2278.38 cw(c1368.4,2260) 1390,2260 ; P8.4@1390,2295 1390,2260 ; P8.4@1400.26,2278.38 ccw(c1411.6,2260) 1390,2260 ; v1@2439.39,2459.39 cw(c2377.57,2397.57) 2465,2397.57 ; v1@2448.33,2455.09 cw(c2446.25,2436.46) 2465,2436.46 ; v1(2450,2470) 2470,2450 ; v1@2452.83,2455.27 cw(c2456.45,2436.45) 2470,2450 ; v1@2453.54,2473.54 cw(c2425.86,2445.86) 2465,2445.86 ; v1@2464.73,2467.17 ccw(c2483.55,2463.55) 2470,2450 ; 2465,485 2465,2440 ; 2470,495 3670,495 1.3@3675,490 ; 3615.85,495 cw(c3615.85,430.85) 1.3@3661.21,476.21 ; 3639.99,495 ccw(c3639.99,525.01) 1.3@3661.21,503.79
  Bottom Layer w20: P8.4@1376.19,2308.81 ccw(c1342.86,2342.14) 1390,2342.14 ccw(c1437.14,2342.14) P8.4@1403.81,2308.81 ; P8.4@1390,2295 1390,2435 2415,2435 v1(2450,2470) ; v1@2435,2470 cw(c2398.79,2470) 2424.39,2444.39 cw(c2450,2418.79) v1@2450,2455
M2IN1: 1.13 P7.12 U1.12 | length 3147.7
  Top Layer w10: U1.12@1095.16,1649 1095.16,1598.31 1112.46,1581 1134,1581 1195,1520
  Top Layer w20: 1195,1520 1475,1240 P7.12@1490,1240 ; 1431.06,1283.94 ccw(c1490,1342.88) P7.12@1490,1259.53 ; P7.12@1482.5,1232.5 P7.12@1490,1225
  Bottom Layer w20: P7.12@1477.99,1255.4 ccw(c1458.8,1280) 1490,1280 ; P7.12@1490,1240 1490,1280 ; P7.12@1502.01,1255.4 cw(c1521.2,1280) 1490,1280 ; 1.13@3655,1490 cw(c3606.72,1490) 3640.86,1455.86 cw(c3675,1421.72) 1.13@3675,1470 ; 1.13@3675,1490 3480,1295 1805,1295 1765,1335 1545,1335 1490,1280